# Altium PCB 海关全向控制器按键板V2.PcbDoc
Units mm, origin at the board's own origin, x right, y up, seen from the top; angles counter-clockwise.
Board outline 80 x 12 mm, 2 copper layers (Top Layer, Bottom Layer); 15 components, 10 nets, 40 pads, 2 vias.
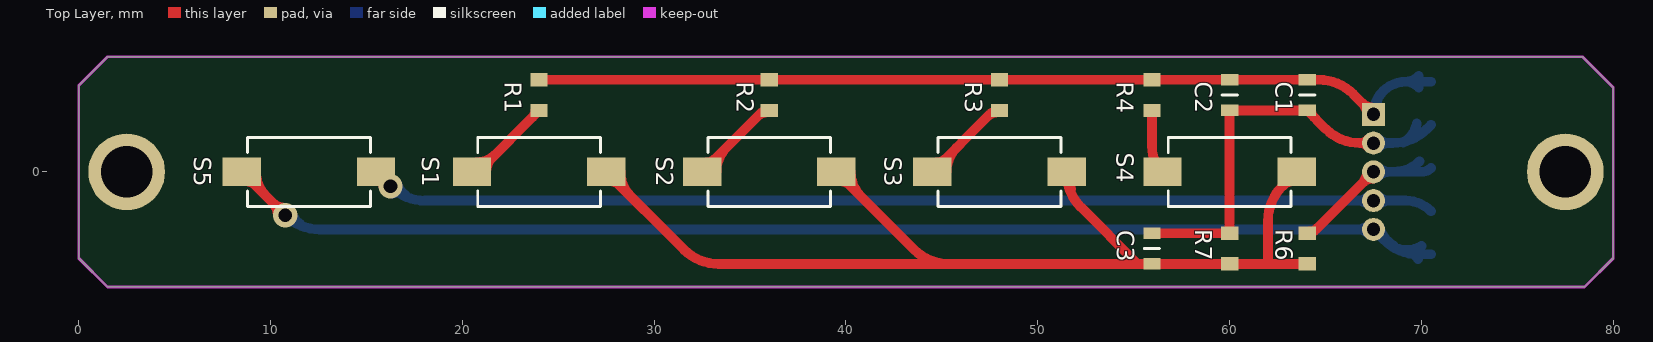
[diagram p0: Top Layer view]
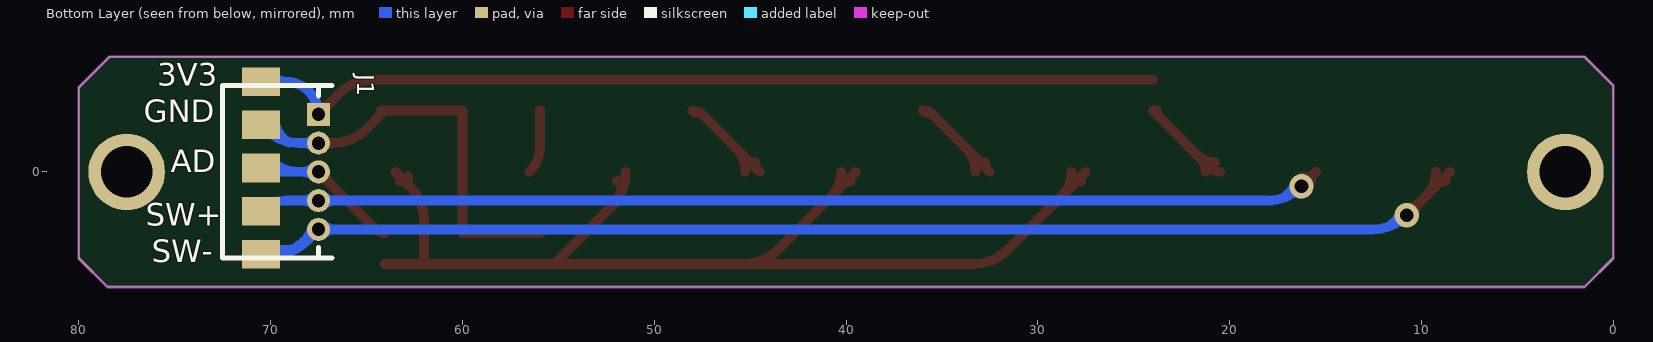
[diagram p1: Bottom Layer view, seen from below]
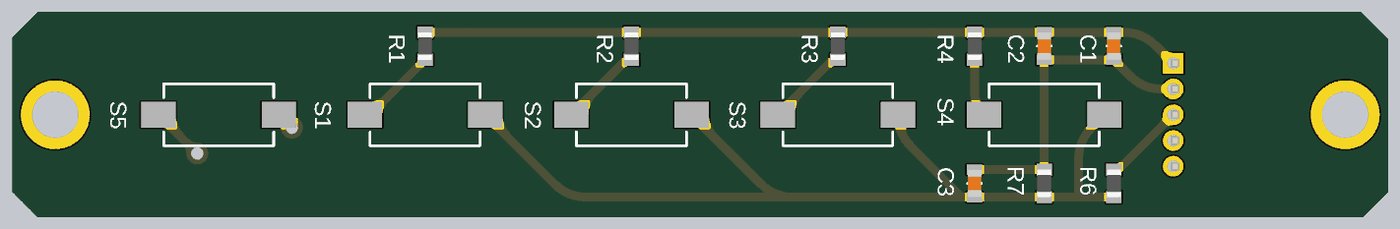
[diagram p2: 3D render of the assembled board from above, using the file's embedded part models]

## Layer stack, top to bottom
Top Solder: solder mask 0.0102, Solder Resist, Dk 3.5
Top Layer: signal copper 0.0356
Dielectric 1: dielectric 0.32, FR-4, Dk 4.8
Bottom Layer: signal copper 0.0356
Bottom Solder: solder mask 0.0102, Solder Resist, Dk 3.5

## Board outline
0,-4.5 1.5,-6 78.5,-6 80,-4.5 80,4.4 78.4,6 1.5,6 0,4.5

## Design rules (kind name [scope] priority, off if disabled: settings)
Clearance [All] p1: gap=0.152
ComponentClearance [All] p1: gap=0 collisioncheckmode=3 verticalgap=0 showdistances=FALSE
Height [All] p1: minheight=0 maxheight=50.8 prefheight=12.7
HoleSize [All] p1: absolutevalues=TRUE maxlimit=5.08 minlimit=0.025 maxpercent=80.000 minpercent=20.000
HoleToHoleClearance [All] p1: gap=0.152 allowstackedmicrovias=TRUE
MinimumSolderMaskSliver [All] p1: minsoldermaskwidth=0
PlaneConnect [All] p1: planeconnectstyle=Direct reliefexpansion=0.508 reliefentries=4 reliefconductorwidth=0.254 reliefairgap=0.254
PolygonConnect [All] p1: connectstyle=Direct reliefconductorwidth=0.254 reliefentries=4 polygonreliefangle="90 Angle" airgapwidth=0.254
RoutingVias [All] p1: holewidth=0.711 width=1.27 viastyle="Through Hole" minholewidth=0.203 minwidth=0.305 maxholewidth=5.08 maxwidth=7.62
SilkToSilkClearance [All] p1: silktosilkclearance=0
SilkToSolderMaskClearance [IsPad] p1: minsilkscreentomaskgap=0 clearancetoexposedcopper=TRUE
SolderMaskExpansion [All] p1: expansion=0.102
Width [All] p1: maxlimit=4 minlimit=0.254 preferedwidth=0.254
21 further rules are at their usual default settings.

## Components (designator, comment, footprint, x,y, rotation, side; value= is the part's Value field where it differs from the comment)
C1 "10uF" C0603 64.05,4 r90 top
C2 "0.1uF" C0603 60,4 r90 top
C3 "0.1uF" C0603 55.95,-4 r270 top
J1 "Jack 1x5" ZH-5AWD 67.5,0 r270 bottom
R1 "1K" R0603 24,4 r90 top
R2 "2K" R0603 36,4 r90 top
R3 "3K" R0603 48,4 r90 top
R4 "4.7K" R0603 55.95,4 r90 top
R6 "1K" R0603 64.05,-4 r270 top
R7 "1K" R0603 60,-4 r270 top
S1 "SW-PB" SW3X6X5 24,0 r180 top
S2 "SW-PB" SW3X6X5 36,0 r180 top
S3 "SW-PB" SW3X6X5 48,0 r180 top
S4 "SW-PB" SW3X6X5 60,0 r180 top
S5 "SW-PB" SW3X6X5 12,0 r0 top

## Footprints (in the part's own frame and the unit in brackets; to place one, negate y for a bottom-side part, rotate by r counter-clockwise, add the part's x,y. Pads: shape width x height; smd on the part's side, far side on the other; paste and mask are expansions set on the pad)
C0603 [mm]
  rect 0.6x0.9 smd: 1(-0.8,0) 2(0.8,0)
  silkscreen extent 0,-0.4 0,0.4, body extent -0.8,-0.4 0.8,0.4, height 0.5
R0603 [mm]
  rect 0.7x0.9 smd: 1(-0.8,0) 2(0.8,0)
  body extent -0.8,-0.4 0.8,0.4, height 0.37
SW3X6X5 [mm] "2脚表贴轻触开关"
  rect 2x1.5 smd: 1(-3.5,0) 2(3.5,0)
  silkscreen extent -3.2,-1.8 3.2,1.8, body extent -4.03,-1.75 4.03,1.75, height 4.6
ZH-5AWD [mm] "1.5mm，5P，卧插"
  rect 1.2x1.2 hole 0.7: 1(-3,0)
  round 1.2 hole 0.7: 2(-1.5,0) 3(0,0) 4(1.5,0) 5(3,0)
  silkscreen extent -4.5,-5 4.5,0.7, body extent -4.5,-5.05 4.5,0.65, height 3.95

## Part data
C1 C2 C3: library part CAP, "CAP"
J1: "插座"
R1 R2 R3 R4 R6 R7: library part Res, "Resistor"
S1 S2 S3 S4 S5: "Switch"

## Free pads (board coordinates)
  round 4 hole 2.7: ""(2.5,0) ""(77.5,0)
  rect 2x1.5 smd far side: ""(70.5,-4.3) ""(70.5,-2.05) ""(70.5,0.2) ""(70.5,2.45) ""(70.5,4.7)

## Via types
v1: diameter 1.27, hole 0.711, Top Layer to Bottom Layer, tented both sides, 2 vias

## Nets (pads, with @x,y where several pads share a name; then routed paths per layer and width w, separated by ;. In a path a pad name is that pad's centre, name@x,y a point inside that pad or via, vN(x,y) a via of type N, cw(c..) or ccw(c..) an arc to the next point about the centre after c; other vN are vias at no path point)
+3.3V: C1.2 C2.2 J1.1 pad.@70.5,4.7 R1.2 R2.2 R3.2 R4.2 | length 52.3
  Top Layer w0.508: R1.2 R2.2 R3.2 R4.2 C2.2 C1.2 64.648,4.8 cw(c64.648,2.26) 66.444,4.056 J1.1 ; J1.1@67.154,3 ccw(c66.319,3) 66.909,3.591 ccw(c67.5,4.181) J1.1@67.5,3.346
  Bottom Layer w0.508: J1.1@67.327,3.3 ccw(c66.909,4.023) 67.716,3.807 ccw(c68.523,3.591) J1.1@67.8,3.173 ; J1.1 cw(c69.2,3) 69.2,4.7 ; pad.@69.867,4.385 ccw(c69.2,3.837) 69.2,4.7 ; pad.@69.867,5.015 cw(c69.2,5.563) 69.2,4.7 ; pad.@70.5,4.7 69.2,4.7
AD_KEY: J1.3 pad.@70.5,0.2 R6.1 | length 12.4
  Top Layer w0.508: R6.1 ccw(c64.05,-2.596) 64.477,-3.023 J1.3 ; R6.1@64.15,-3.104 ccw(c64.15,-2.51) 64.57,-2.93 ; J1.3@67.154,0 cw(c66.319,0) 66.909,-0.591 cw(c67.5,-1.181) J1.3@67.5,-0.346
  Bottom Layer w0.508: J1.3 70.017,0 ccw(c70.017,0.683) pad.@70.5,0.2 ; J1.3@67.745,-0.245 cw(c68.335,-0.835) 68.335,0 cw(c68.335,0.835) J1.3@67.745,0.245 ; 68.57,0 ccw(c68.57,1.88) pad.@69.899,0.551
GND: C1.1 C2.1 C3.1 J1.2 pad.@70.5,2.45 R7.1 | length 25.8
  Top Layer w0.508: C3.1 R7.1 C2.1 C1.1 65.006,2.244 ccw(c66.802,4.04) 66.802,1.5 ; C1.1@64.246,3.2 ccw(c64.719,3.2) 64.385,2.865 ; J1.2@67.225,1.291 ccw(c66.802,0.969) 66.802,1.5 ; J1.2@67.225,1.709 cw(c66.802,2.031) 66.802,1.5 ; J1.2 66.802,1.5
  Bottom Layer w0.508: J1.2 68.498,1.5 ccw(c68.498,4.04) 70.294,2.244 pad.@70.5,2.45 ; J1.2@67.745,1.255 cw(c68.335,0.665) 68.335,1.5 cw(c68.335,2.335) J1.2@67.745,1.745 ; 69.055,1.529 ccw(c68.326,2.791) pad.@69.762,2.537
NetC3_2: C3.2 R6.2 R7.2 S1.1 S2.1 S3.1 S4.1 | length 63
  Top Layer w0.508: S1.1 31.556,-4.056 ccw(c33.352,-2.26) 33.352,-4.8 45.352,-4.8 ; S1.1@27.75,-0.496 cw(c27.75,-1.09) S1.1@28.17,-0.67 ; S1.1@28.246,0 ccw(c30.047,0) 28.774,-1.274 ; S2.1 43.556,-4.056 ccw(c45.352,-2.26) 45.352,-4.8 ; S2.1@39.75,-0.496 cw(c39.75,-1.09) S2.1@40.17,-0.67 ; S2.1@40.246,0 ccw(c42.047,0) 40.774,-1.274 ; S3.1 51.5,-0.048 ccw(c54.04,-0.048) 52.244,-1.844 55.2,-4.8 ; 51.726,-0.893 cw(c52.082,-0.798) S3.1@51.941,-0.458 ; S4.1@62.816,-0.241 cw(c62.438,-0.45) 62.744,-0.756 ; S4.1@62.83,-0.67 cw(c63.25,-1.09) S4.1@63.25,-0.496 ; S4.1 62.744,-0.756 ; R6.2 62,-4.8 ; 45.352,-4.8 55.2,-4.8 ; 55.2,-4.8 C3.2 R7.2 62,-4.8 ; 62,-4.8 62,-2.552 cw(c64.54,-2.552) 62.744,-0.756
NetJ1_4: J1.4 pad.@70.5,-2.05 S5.2 | length 62.2
  Top Layer w0.508: S5.2 v1(16.256,-0.756) cw(c16.562,-0.45) S5.2@16.184,-0.241 ; S5.2@15.75,-0.496 cw(c15.75,-1.09) S5.2@16.17,-0.67 ; v1@15.875,-0.756 ccw(c14.955,-0.756) 15.606,-0.106 ccw(c16.256,0.545) S5.2@16.256,-0.375
  Bottom Layer w0.508: v1(16.256,-0.756) ccw(c18.052,1.04) 18.052,-1.5 J1.4 69.172,-1.5 cw(c69.172,-3.378) pad.@70.5,-2.05 ; v1@16.355,-1.124 cw(c16.593,-2.013) 17.053,-1.216 cw(c17.513,-0.419) v1@16.624,-0.657 ; J1.4@67.255,-1.745 ccw(c66.665,-2.335) 66.665,-1.5 ccw(c66.665,-0.665) J1.4@67.255,-1.255 ; J1.4@67.745,-1.745 cw(c68.335,-2.335) 68.335,-1.5 cw(c68.335,-0.665) J1.4@67.745,-1.255
NetJ1_5: J1.5 pad.@70.5,-4.3 S5.1 | length 72.7
  Top Layer w0.508: S5.1 v1(10.756,-2.256) ; S5.1@8.75,-0.496 cw(c8.75,-1.09) S5.1@9.17,-0.67 ; S5.1@9.246,0 ccw(c11.047,0) 9.774,-1.274 ; v1@10.375,-2.256 ccw(c9.455,-2.256) 10.106,-1.606 ccw(c10.756,-0.955) v1@10.756,-1.875
  Bottom Layer w0.508: v1(10.756,-2.256) ccw(c12.552,-0.46) 12.552,-3 J1.5 68.056,-3.556 ccw(c69.852,-1.76) 69.852,-4.3 pad.@70.5,-4.3 ; v1@10.855,-2.624 cw(c11.093,-3.513) 11.553,-2.716 cw(c12.013,-1.919) v1@11.124,-2.157 ; J1.5@67.255,-3.245 ccw(c66.665,-3.835) 66.665,-3 ccw(c66.665,-2.165) J1.5@67.255,-2.755 ; J1.5@67.834,-2.91 ccw(c69.312,-2.514) 68.547,-3.84 ; 68.827,-4.025 ccw(c69.227,-2.529) pad.@70.002,-3.87 ; 69.307,-4.154 cw(c69.088,-4.971) pad.@69.82,-4.548
NetR1_1: R1.1 S1.2 | length 7
  Top Layer w0.508: S1.2 ccw(c20.5,0.724) 21.012,0.212 R1.1 ; S1.2@20.75,0.496 ccw(c20.75,1.814) 21.682,0.882 ; S1.2@21.246,0 cw(c22.323,0) 21.561,0.761 ; R1.1@23.665,2.865 ccw(c23.331,3.2) R1.1@23.804,3.2
NetR2_1: R2.1 S2.2 | length 7.7
  Top Layer w0.508: S2.2 35.488,2.988 ; S2.2@32.75,0.496 ccw(c32.75,1.09) S2.2@33.17,0.67 ; S2.2@33.246,0 cw(c35.047,0) 33.774,1.274 ; 35.395,2.895 cw(c35.9,2.389) R2.1@35.9,3.104 ; R2.1@35.881,3.106 ccw(c35.794,2.682) 35.488,2.988 ; R2.1 ccw(c36,2.476) 35.488,2.988
NetR3_1: R3.1 S3.2 | length 7.7
  Top Layer w0.508: S3.2 47.488,2.988 ; S3.2@44.75,0.496 ccw(c44.75,1.09) S3.2@45.17,0.67 ; S3.2@45.246,0 cw(c47.047,0) 45.774,1.274 ; 47.395,2.895 cw(c47.9,2.389) R3.1@47.9,3.104 ; R3.1@47.881,3.106 ccw(c47.794,2.682) 47.488,2.988 ; R3.1 ccw(c48,2.476) 47.488,2.988
NetR4_1: R4.1 S4.2 | length 3.3
  Top Layer w0.508: R4.1 55.95,1.328 ccw(c57.828,1.328) S4.2

## Keep-outs
Keep-Out Layer:
  the board outline again, w0.152

## Silkscreen, mask and mechanical layers (free items; w line width, h text height)
Bottom Overlay:
  text "3V3" at 75.9,4.1 h2.03
  text "GND" at 76.6,2.2 h2.03
  text "AD" at 75.2,-0.4 h2.03
  text "SW+" at 76.5,-3.2 h2.03
  text "SW-" at 76.2,-5.1 h2.03